# EAGLE board Strain_Gauges_Amplifier_SMD (EAGLE 7.6.0)
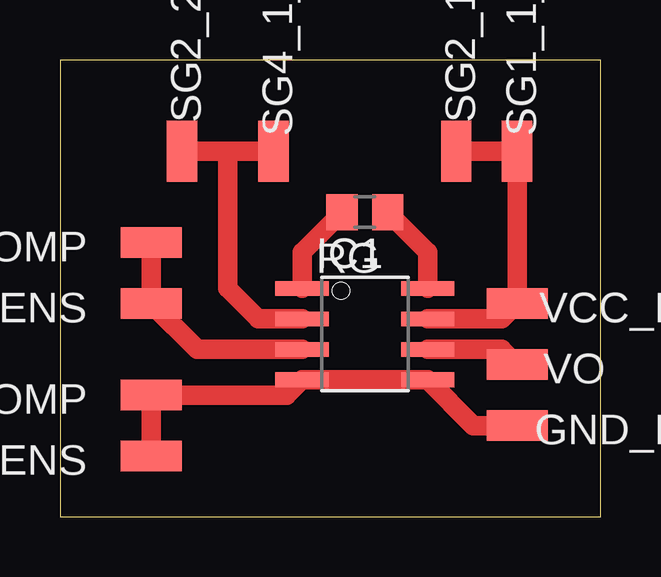
[diagram p0: board, top side]

Size 22.53 x 19.04 mm. Coordinates in mm from the lower left corner, seen from the top.
Outline: 0,0 22.53,0 22.53,19.04 0,19.04 0,0
Copper layers (1*16): Top 0.035mm / dielectric 1.5mm / Bottom 0.035mm
Design rules "default": minimum track width 10mil, minimum drill 24mil, track to track 8mil, track to pad 8mil, pad to pad 8mil, via to via 8mil, smd to smd 8mil, copper to edge 40mil, drill to drill 8mil, minimum pad ring 10mil, minimum via ring 8mil, stop-mask expansion 4mil, vias tented up to drill 0mil, thermal gap 10mil

## Footprints (pad centres in the part's own frame; a part is rotated, then mirrored left to right if it is on the bottom)
SMD1,27-2,54 = smd 1.27 x 2.54: 1 0,0
SO08 = smd 0.61 x 2.21: 1 -1.905,-2.616; 2 -0.635,-2.616; 3 0.635,-2.616; 4 1.905,-2.616; 5 1.905,2.616; 6 0.635,2.616; 7 -0.635,2.616; 8 -1.905,2.616
R0805 = smd 1.3 x 1.5: 1 -0.95,0; 2 0.95,0

## Placement (x,y rotation side)
GND_IN  [SMD1,27-2,54]  19.05,3.81 90 top
IC1  INA122U  [SO08]  12.7,7.62 270 top
RG  [R0805]  12.7,12.7 180 top
SG1_1_COMP  [SMD1,27-2,54]  19.05,15.24 180 top
SG1_2_COMP  [SMD1,27-2,54]  3.81,11.43 90 top
SG2_1_TENS  [SMD1,27-2,54]  16.51,15.24 180 top
SG2_2_TENS  [SMD1,27-2,54]  5.08,15.24 180 top
SG3_1_TENS  [SMD1,27-2,54]  3.81,8.89 90 top
SG3_2_TENS  [SMD1,27-2,54]  3.81,2.54 90 top
SG4_1_COMP  [SMD1,27-2,54]  8.89,15.24 180 top
SG4_2_COMP  [SMD1,27-2,54]  3.81,5.08 90 top
VCC_IN  [SMD1,27-2,54]  19.05,8.89 90 top
VO  [SMD1,27-2,54]  19.05,6.35 90 top

## Library data of the parts
GND_IN SG1_1_COMP SG1_2_COMP SG2_1_TENS SG2_2_TENS SG3_1_TENS SG3_2_TENS SG4_1_COMP SG4_2_COMP VCC_IN VO = wirepad
IC1 = burr-brown; MPN: INA122U; OC_FARNELL: 1212407; OC_NEWARK: 97K1918
RG = eagle-ltspice; SPICEMODEL: NONE; SPICEPREFIX: R

## Nets
GND: GND_IN.1 IC1.4 IC1.5 SG3_2_TENS.1 SG4_2_COMP.1
N$1: IC1.1 RG.2
N$2: IC1.8 RG.1
N$3: IC1.3 SG1_2_COMP.1 SG3_1_TENS.1
N$5: IC1.2 SG2_2_TENS.1 SG4_1_COMP.1
VCC: IC1.7 SG1_1_COMP.1 SG2_1_TENS.1 VCC_IN.1
VO: IC1.6 VO.1

## Tracks (layer width: path | path; a pad name or v marks a point on that pad's centre or on a via)
GND
  Top 0.813: SG3_2_TENS.1 SG4_2_COMP.1 9.45,5.08 IC1.4 IC1.5 17.22,3.81 GND_IN.1
N$1
  Top 0.813: IC1.1 10.08,11.03 RG.2
N$2
  Top 0.813: IC1.8 15.32,11.03 RG.1
N$3
  Top 0.813: IC1.3 5.71,6.99 SG3_1_TENS.1 SG1_2_COMP.1
N$5
  Top 0.813: SG2_2_TENS.1 6.99,15.24 | 6.99,15.24 SG4_1_COMP.1 | IC1.2 8.26,8.26 6.99,9.53 6.99,15.24
VCC
  Top 0.813: SG2_1_TENS.1 SG1_1_COMP.1 VCC_IN.1 18.41,8.26 IC1.7
VO
  Top 0.813: IC1.6 18.41,6.99 VO.1